# Altium PCB bh_ai8&di8_alph_back.PcbDoc
Units mil, origin at the board's own origin, x right, y up, seen from the top; angles counter-clockwise.
Board outline 2322.83 x 1535.43 mil, 2 copper layers (Top Layer, Bottom Layer); 75 components, 78 nets, 243 pads, 14 vias.
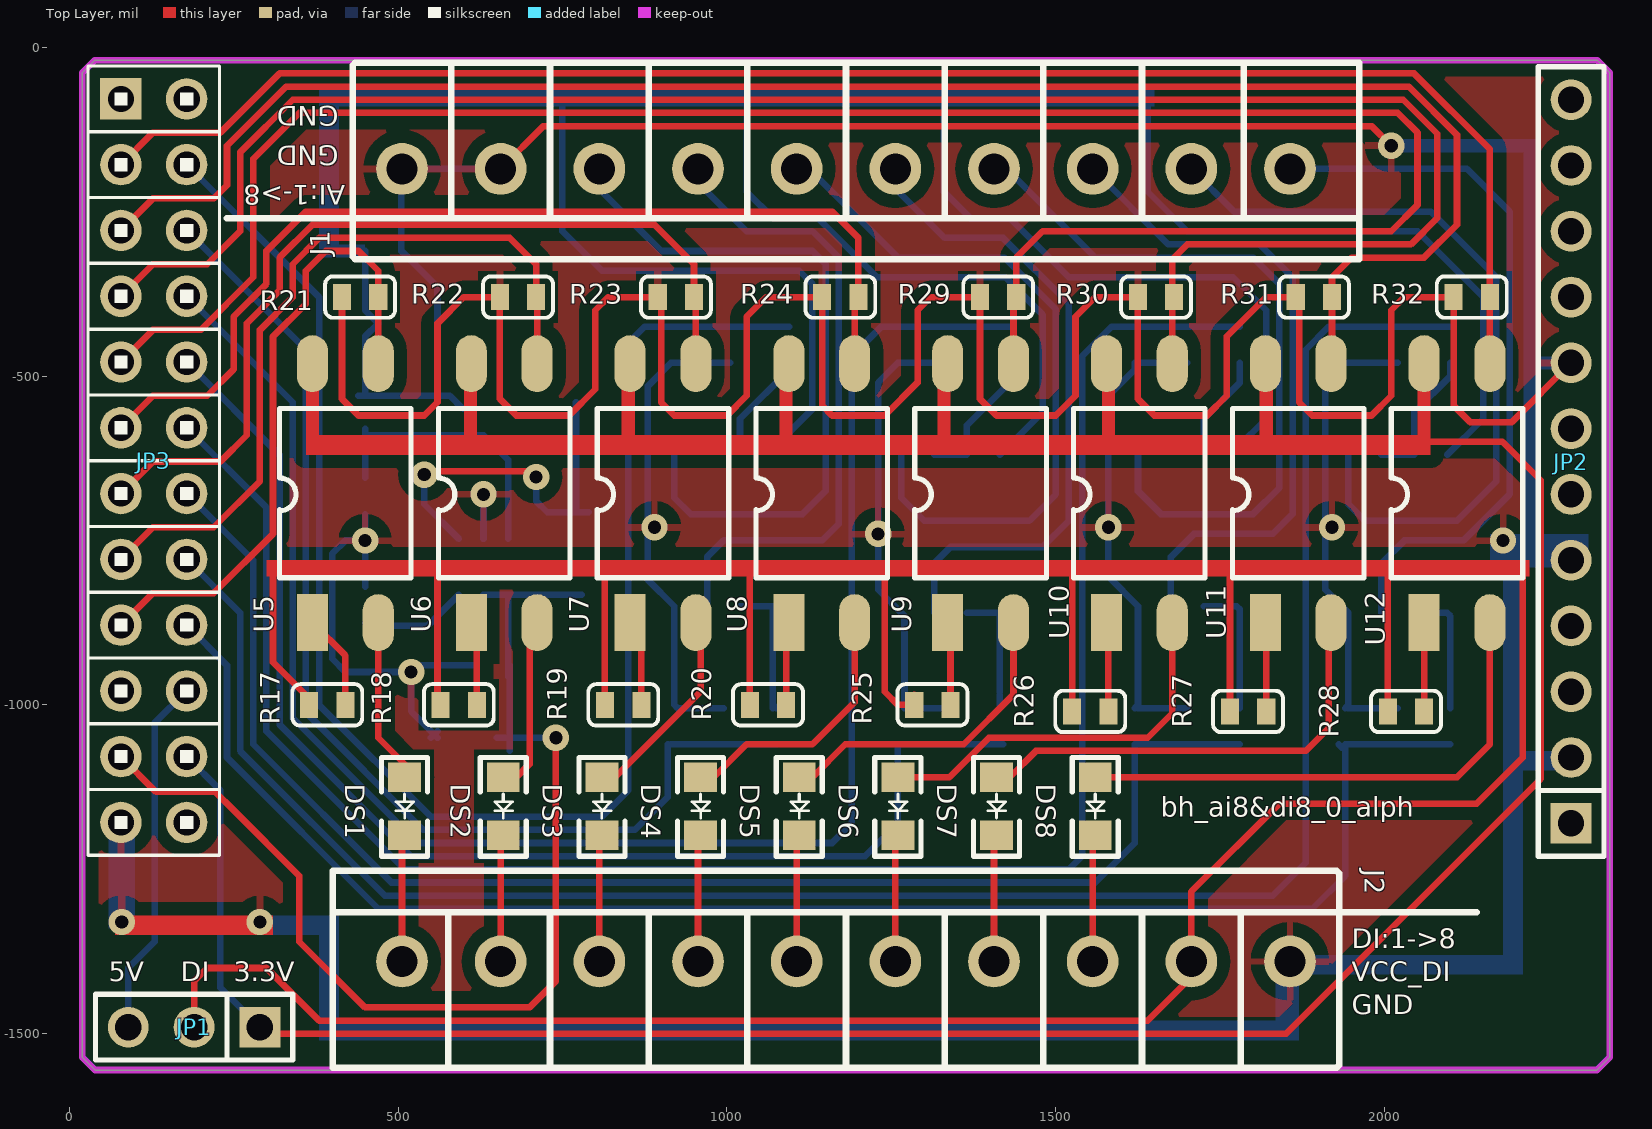
[diagram p0: Top Layer view]
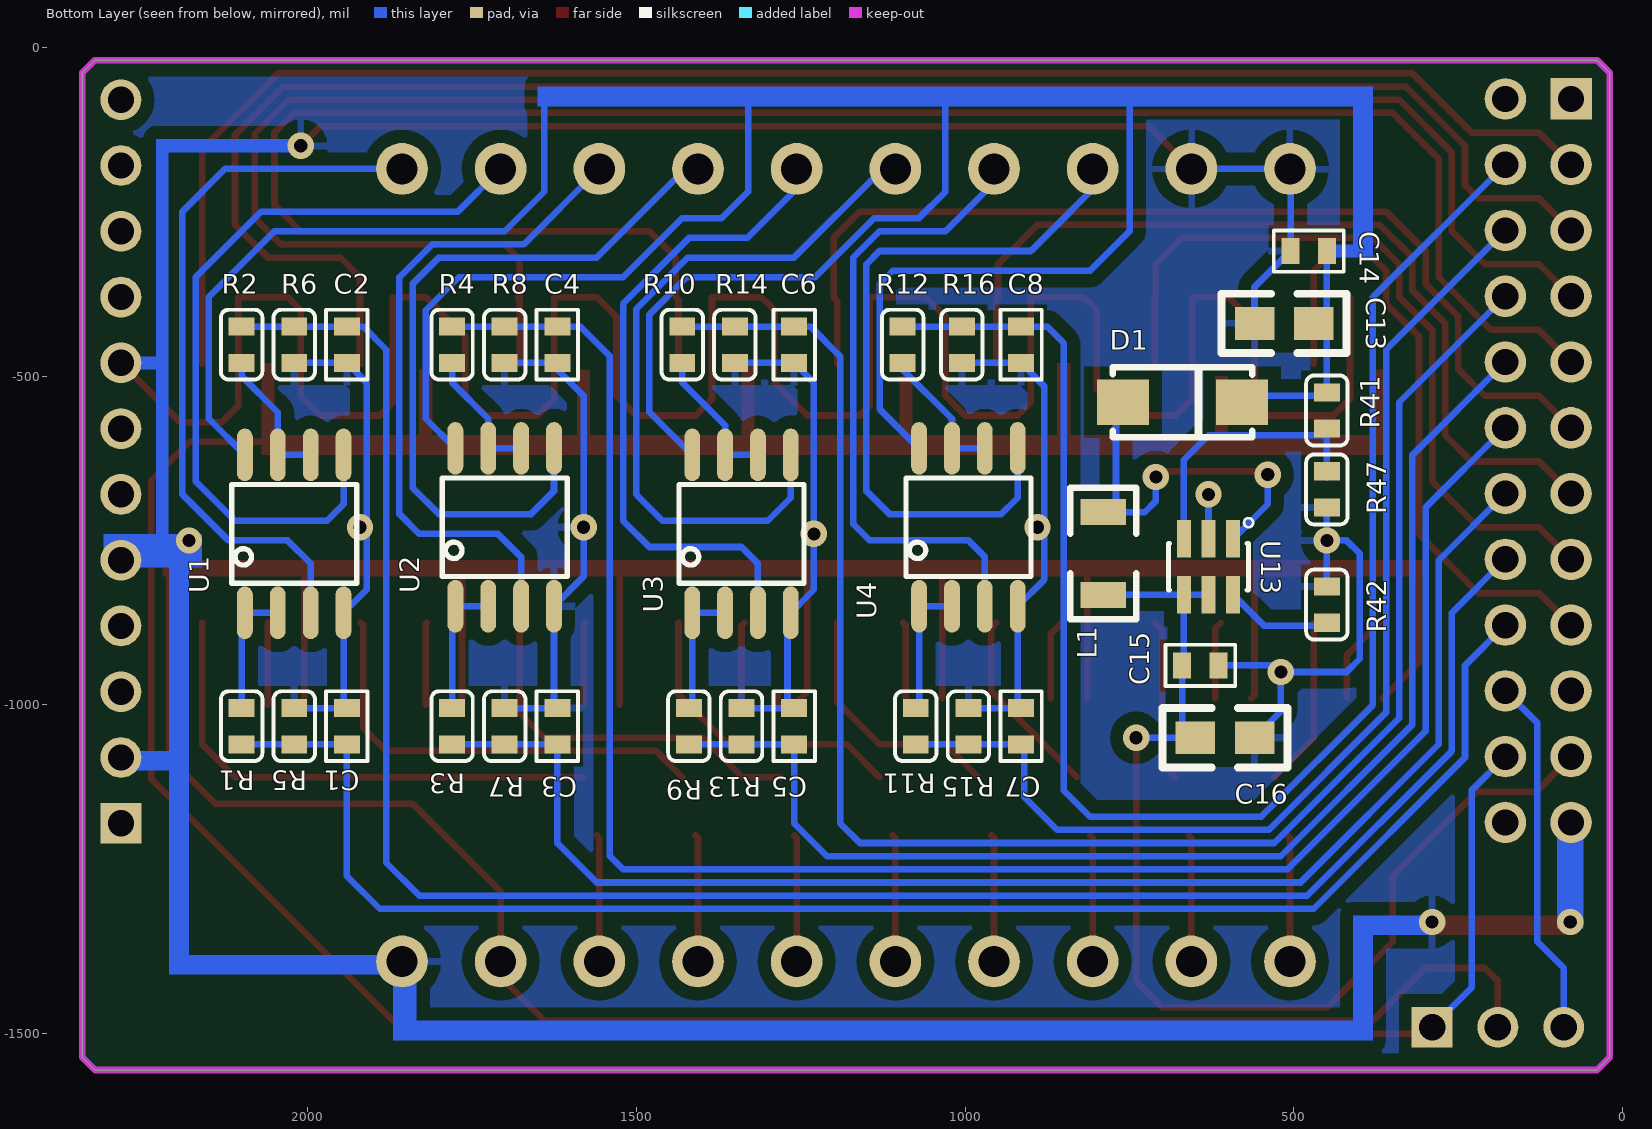
[diagram p1: Bottom Layer view, seen from below]

## Layer stack, top to bottom
Top Layer: signal copper 1.4
Dielectric: dielectric 12.6, FR-4, Dk 4.8
Bottom Layer: signal copper 1.4

## Board outline
19.68,-39.37 39.37,-19.68 2322.83,-19.68 2342.52,-39.37 2342.52,-1535.43 2322.83,-1555.12 39.37,-1555.12 19.68,-1535.43

## Design rules (kind name [scope] priority, off if disabled: settings)
Clearance Clearance_1 [(InPolygon)] p1: gap=20
Clearance [All] p2: gap=10
MinimumSolderMaskSliver [All] p1 off: minsoldermaskwidth=10
PolygonConnect [All] p1: connectstyle=Relief reliefconductorwidth=10 reliefentries=4 polygonreliefangle="90 Angle"
RoutingVias [All] p1: holewidth=20 width=40 viastyle="Through Hole" minholewidth=20 minwidth=40 maxholewidth=20 maxwidth=40
SilkToSilkClearance [All] p1: silktosilkclearance=5
SilkscreenOverComponentPads [All] p1 off: minsilkscreentomaskgap=5
SolderMaskExpansion [All] p1: expansion=4
Width Width_1 [(InNet('GND') OR InNet('VBUS') OR InNet('VCC_7.2V') OR InNet('VCC_BASE_5V') OR InNet('VCC_DI') OR InNet('VCC_SENSOR_3.3V') OR InNet('VCC_SENSOR_5V'))] p1: maxlimit=20 minlimit=10 preferedwidth=20 minimp=50.000000 maximp=50.000000 favimp=50.000000
Width [All] p2: maxlimit=10 minlimit=10 preferedwidth=10
25 further rules are at their usual default settings.

## Components (designator, comment, footprint, x,y, rotation, side; value= is the part's Value field where it differs from the comment)
C1 "CAP-SMD" C0603 1940,-1060 r90 bottom
C2 "CAP-SMD" C0603 1940,-424.88 r270 bottom
C3 "CAP-SMD" C0603 1620,-1060 r90 bottom
C4 "CAP-SMD" C0603 1620,-424.88 r270 bottom
C5 "CAP-SMD" C0603 1260,-1060 r90 bottom
C6 "CAP-SMD" C0603 1260,-424.88 r270 bottom
C7 "CAP-SMD" C0603 915,-1060 r90 bottom
C8 "CAP-SMD" C0603 915,-424.88 r270 bottom
C13 "22uF/16V" C0805 470,-420 r0 bottom
C14 "0.1uF" C0603 450,-310 r0 bottom
C15 "0.1uF" C0603 670,-940 r180 bottom
C16 "10uF/6.3V" C0805 650,-1050 r180 bottom
D1 "SM340A" DO-214 760,-540 r180 bottom
DS1 "LED" D0805 510,-1110 r270 top
DS2 "LED" D0805 660,-1110 r270 top
DS3 "LED" D0805 810,-1110 r270 top
DS4 "LED" D0805 960,-1110 r270 top
DS5 "LED" D0805 1110,-1110 r270 top
DS6 "LED" D0805 1260,-1110 r270 top
DS7 "LED" D0805 1410,-1110 r270 top
DS8 "LED" D0805 1560,-1110 r270 top
J1 "SIP1X10" CON10*0.381 1181.1,-185 r90 top
J2 "SIP1X10" CON10*0.381 1181.1,-1390 r270 top
JP1 "JUMPER3" SIP1X3X2.54 290,-1490 r180 top
JP2 "SPI/UART Connector" SIP1x12x2.54 2283.46,-1180 r90 top locked
JP3 "Sensor Connector" SIP2X12X2.54 78.74,-78.74 r270 top locked
L1 "INDUCTOR" R1206 790,-770 r90 bottom
R1 "10k 1%" R0603 2100,-1004.88 r270 bottom
R2 "10k 1%" R0603 2100,-424.88 r270 bottom
R3 "10k 1%" R0603 1780,-1004.88 r270 bottom
R4 "10k 1%" R0603 1780,-424.88 r270 bottom
R5 "10k 1%" R0603 2020,-1060 r90 bottom
R6 "10k 1%" R0603 2020,-424.88 r270 bottom
R7 "10k 1%" R0603 1700,-1060 r90 bottom
R8 "10k 1%" R0603 1700,-424.88 r270 bottom
R9 "10k 1%" R0603 1420,-1004.88 r270 bottom
R10 "10k 1%" R0603 1430,-424.88 r270 bottom
R11 "10k 1%" R0603 1075,-1004.88 r270 bottom
R12 "10k 1%" R0603 1095,-424.88 r270 bottom
R13 "10k 1%" R0603 1340,-1060 r90 bottom
R14 "10k 1%" R0603 1350,-424.88 r270 bottom
R15 "10k 1%" R0603 995,-1060 r90 bottom
R16 "10k 1%" R0603 1005,-424.88 r270 bottom
R17 "2k" R0603 420,-1000 r180 top
R18 "2k" R0603 620,-1000 r180 top
R19 "2k" R0603 870,-1000 r180 top
R20 "2k" R0603 1090,-1000 r180 top
R21 "2k" R0603 470,-380 r180 top
R22 "2k" R0603 710,-380 r180 top
R23 "2k" R0603 950,-380 r180 top
R24 "2k" R0603 1200,-380 r180 top
R25 "2k" R0603 1340,-1000 r180 top
R26 "2k" R0603 1580,-1010 r180 top
R27 "2k" R0603 1820,-1010 r180 top
R28 "2k" R0603 2060,-1010 r180 top
R29 "2k" R0603 1440,-380 r180 top
R30 "2k" R0603 1680,-380 r180 top
R31 "2k" R0603 1920,-380 r180 top
R32 "2k" R0603 2160,-380 r180 top
R41 "110k 1%" R0603 450,-580 r90 bottom
R42 "18k" R0603 450,-820 r270 bottom
R47 "10k 1%" R0603 450,-700 r90 bottom
U1 "LM358N" SO8NB 2020,-740 r180 bottom
U2 "LM358N" SO8NB 1700,-730 r180 bottom
U3 "LM358N" SO8NB 1340,-740 r180 bottom
U4 "LM358N" SO8NB 995,-730 r180 bottom
U5 "PC817" SOP_4 370,-870 r0 top
U6 "PC817" SOP_4 611.43,-870 r0 top
U7 "PC817" SOP_4 852.86,-870 r0 top
U8 "PC817" SOP_4 1094.29,-870 r0 top
U9 "PC817" SOP_4 1335.71,-870 r0 top
U10 "PC817" SOP_4 1577.14,-870 r0 top
U11 "PC817" SOP_4 1818.57,-870 r0 top
U12 "PC817" SOP_4 2060,-870 r0 top
U13 "FP6291" SOT23-6 630,-790 r180 bottom

## Footprints (in the part's own frame and the unit in brackets; to place one, negate y for a bottom-side part, rotate by r counter-clockwise, add the part's x,y. Pads: shape width x height; smd on the part's side, far side on the other; paste and mask are expansions set on the pad)
C0603 [mm]
  rect 0.7x1 smd: 1(0,0) 2(1.4,0)
  silkscreen extent -0.65,-0.8 2.05,0.8, body extent -0.09,-0.38 1.51,0.42, height 0.3
C0805 [mil]
  rect 60x50 smd: 1(0,0) 2(90,0)
  silkscreen extent -50,-45 140,45, body extent 6,-25 84,25, height 31
CON10*0.381 [mm]
  round 2 hole 1.2: 1(0,-17.145) 2(0,-13.335) 3(0,-9.525) 4(0,-5.715) 5(0,-1.905) 6(0,1.905) 7(0,5.715) 8(0,9.525) 9(0,13.335) 10(0,17.145)
  silkscreen extent -3.5,-19.81 4.1,19.05
D0805 [mil]
  rect 45x50 smd: A(0,0) K(88,0)
  silkscreen extent -30,-35 120,35, body extent 7,-20 88,16, height 33
DO-214 [mm]
  rect 2x1.75 smd: 1(0,0) 2(4.6,0)
  silkscreen extent -0.4,-1.35 5,1.35, body extent -0.2,-1.34 4.91,1.33, height 2.12
R0603 [mm]
  rect 0.7x1 smd: 1(0,0) 2(1.4,0)
  silkscreen extent -0.65,-0.8 2.05,0.8, body extent -0.1,-0.4 1.5,0.4, height 0.3
R1206 [mm] "Chip Resistor, 2-Leads, Body 3.2x1.6mm, IPC Medium Density"
  rect 1x1.75 smd: 1(-1.6,0) 2(1.6,0)
  silkscreen extent -2.54,-1.27 2.54,1.27, body extent -1.65,-0.8 1.65,0.8, height 0.6
SIP1X3X2.54 [mil]
  rect 62x62 hole 40: 1(0,0)
  round 62 hole 40: 2(100,0) 3(200,0)
  silkscreen extent -50,-50 250,50, body extent -49,-53 253,47, height 340
SIP1x12x2.54 [mil]
  rect 62x62 hole 40: 1(0,0)
  round 62 hole 40: 2(100,0) 3(200,0) 4(300,0) 5(400,0) 6(500,0) 7(600,0) 8(700,0) 9(800,0) 10(900,0) 11(1000,0) 12(1100,0)
  silkscreen extent -50,-50 1150,50
SIP2X12X2.54 [mil]
  rect 63x63 hole 40: 1(0,0)
  round 63 hole 40: 2(0,100) 3(100,0) 4(100,100) 5(200,0) 6(200,100) 7(300,0) 8(300,100) 9(400,0) 10(400,100) 11(500,0) 12(500,100) 13(600,0) 14(600,100) 15(700,0) 16(700,100) 17(800,0) 18(800,100) 19(900,0) 20(900,100) 21(1000,0) 22(1000,100) 23(1100,0) 24(1100,100)
  silkscreen extent -50,-50 1150,150, body extent -51,-52 1148,150, height 340
SO8NB [mil]
  oval 24x80 smd: 1(-75,-120) 2(-25,-120) 3(25,-120) 4(75,-120) 5(75,120) 6(25,120) 7(-25,120) 8(-75,120)
  silkscreen extent -95,-75 95,75, body extent -97,-118 96,118, height 61
SOP_4 [mm] "SOP_4"
  rect 1.2x2.2 smd: 1(0,-0.127)
  oval 1.2x2.2 smd: 2(2.54,-0.127) 3(2.54,9.873) 4(0,9.873)
  silkscreen extent -1.27,1.61 3.81,8.14
SOT23-6 [mm] "SOT-23/SC-74A; 5 Leads; Body 3.1 x 3 mm, inc. leads (LxW max)"
  rect 0.55x1.45 smd: 1(0.95,1.075) 2(0,1.075) 3(-0.95,1.075) 4(-0.95,-1.075) 5(0,-1.075) 6(0.95,-1.075)
  silkscreen extent -1.55,-0.9 1.72,1.88, body extent -1.4,-1.19 1.4,1.23, height 1.08

## Part data
C1 C2 C3 C4 C5 C6 C7 C8: "SMD-CAP"
C13 C14 C15 C16: library part CAP-SMD, "SMD-CAP"
D1: library part "DIODE SCHOTTKY", "Schottky Diode"
J1 J2: "Connector"
JP1: "Jumper"
JP2: library part SIP1X12, "12 Pin Header"
JP3: library part SIP2X12
L1: "Inductor"
R1 R2 R3 R4 R5 R6 R7 R8 R9 R10 R11 R12 R13 R14 R15 R16 R17 R18 R19 R20 R21 R22 R23 R24 R25 R26 R27 R28 R29 R30 R31 R32 R41 R42 R47: library part RES, "Resistor"
U5 U6 U7 U8 U9 U10 U11 U12: library part P521*1

## Via types
v1: diameter 40, hole 20, Top Layer to Bottom Layer, 14 vias

## Nets (pads, with @x,y where several pads share a name; then routed paths per layer and width w, separated by ;. In a path a pad name is that pad's centre, name@x,y a point inside that pad or via, vN(x,y) a via of type N, cw(c..) or ccw(c..) an arc to the next point about the centre after c; other vN are vias at no path point)
AD0: C1.1 JP3.18 R1.2 R5.1 | length 2409.7
  Bottom Layer w10: JP3.18 240,-940 240,-1080 470,-1310 1890,-1310 1940,-1260 C1.1 R1.2 ; C1.1@1930,-1060 C1.1@1935,-1065
AD1: C2.1 JP3.16 R2.1 R6.1 | length 3071.3
  Bottom Layer w10: JP3.16 260,-860 260,-1070 480,-1290 1830,-1290 1880,-1240 1880,-460 1915.12,-424.88 C2.1 R6.1 R2.1
AD2: C3.1 JP3.14 R3.2 R7.1 | length 2185
  Bottom Layer w10: JP3.14 280,-780 280,-1060 490,-1270 1560,-1270 1620,-1210 C3.1 R3.2
AD3: C4.1 JP3.12 R4.1 R8.1 | length 2865.4
  Bottom Layer w10: JP3.12 300,-700 300,-1040 510,-1250 1520,-1250 1540,-1230 1540,-470 1585.12,-424.88 C4.1 R8.1 R4.1
AD4: C5.1 JP3.10 R9.2 R13.1 | length 1933.3
  Bottom Layer w10: JP3.10 320,-620 320,-1030 520,-1230 1210,-1230 1260,-1180 C5.1 R9.2
AD5: C6.1 JP3.8 R10.1 R14.1 | length 2617.9
  Bottom Layer w10: JP3.8 340,-540 340,-1020 530,-1210 1160,-1210 1190,-1180 1190,-470 1235.12,-424.88 C6.1 R14.1 R10.1
AD6: C7.1 JP3.6 R11.2 R15.1 | length 1692.6
  Bottom Layer w10: JP3.6 360,-460 360,-1011.72 538.28,-1190 860,-1190 910,-1140 C7.1@910,-1060 ; C7.1 R15.1 R11.2
AD7: C8.1 JP3.4 R12.1 R16.1 | length 2397
  Bottom Layer w10: JP3.4 380,-380 380,-1000 550,-1170 810,-1170 850,-1130 850,-450 875.12,-424.88 C8.1 R16.1 R12.1
AI0: J1.1 U1.3 | length 1104.3
  Bottom Layer w10: J1.1 2125,-185 2190,-250 2190,-680 2120,-750 2030,-750 1995,-785 U1.3
AI1: J1.2 U1.5 | length 1177.5
  Bottom Layer w10: J1.2 1771.1,-250 2070,-250 2170,-350 2170,-660 2110,-720 1970,-720 1945,-695 U1.5
AI2: J1.3 U2.3 | length 1019.2
  Bottom Layer w10: J1.3 1671.1,-300 1810,-300 1860,-350 1860,-710 1830,-740 1710,-740 1675,-775 U2.3
AI3: J1.4 U2.5 | length 1127.5
  Bottom Layer w10: J1.4 1425,-185 1560,-320 1800,-320 1840,-360 1840,-670 1800,-710 1660,-710 1625,-675 U2.5
AI4: J1.5 U3.3 | length 1015.7
  Bottom Layer w10: J1.5@1226.1,-185 1331.1,-290 1420,-290 1520,-390 1520,-720 1480,-760 1340,-760 1315,-785 U3.3
AI5: J1.6 U3.5 | length 1095
  Bottom Layer w10: J1.6 1125,-185 1260,-320 1421.72,-320 1500,-398.28 1500,-680 1460,-720 1300,-720 1265,-685 U3.5
AI6: J1.7 U4.3 | length 991.6
  Bottom Layer w10: J1.7@935,-185 1030,-280 1130,-280 1170,-320 1170,-725 1145,-750 995,-750 970,-775 U4.3
AI7: J1.8 U4.5 | length 1109.9
  Bottom Layer w10: J1.8@775,-185 900,-310 1130,-310 1150,-330 1150,-675 1115,-710 945,-710 920,-685 U4.5
DI0: DS1.K J2.1 | length 193.6
  Top Layer w10: J2.1 506.1,-1201.9 DS1.K
DI1: DS2.K J2.2 | length 193.6
  Top Layer w10: J2.2 656.1,-1201.9 DS2.K
DI2: DS3.K J2.3 | length 193.6
  Top Layer w10: J2.3 806.1,-1201.9 DS3.K
DI3: DS4.K J2.4 | length 193.6
  Top Layer w10: J2.4 956.1,-1201.9 DS4.K
DI4: DS5.K J2.5 | length 193.6
  Top Layer w10: J2.5 1106.1,-1201.9 DS5.K
DI5: DS6.K J2.6 | length 193.6
  Top Layer w10: J2.6 1256.1,-1201.9 DS6.K
DI6: DS7.K J2.7 | length 193.6
  Top Layer w10: J2.7 1406.1,-1201.9 DS7.K
DI7: DS8.K J2.8 | length 193.6
  Top Layer w10: J2.8 1556.1,-1201.9 DS8.K
EX_RXD2: JP2.4
EX_RXD5: JP2.7
EX_SPI_CS: JP2.9
EX_TXD2: JP2.3
EX_TXD5: JP2.6
GND: C1.2 C2.2 C3.2 C4.2 C5.2 C6.2 C7.2 C8.2 C13.2 C14.2 C15.2 C16.2 J1.9 J1.10 J2.10 JP2.2 JP2.5 JP2.8 JP3.23 R5.2 R6.2 R7.2 R8.2 R13.2 R14.2 R15.2 R16.2 R21.2 R22.2 R23.2 R24.2 R29.2 R30.2 R31.2 R32.2 R42.1 R47.1 U1.4 U2.4 U3.4 U4.4 U13.2 | length 9778.9
  Top Layer w10: R21.2 414.88,-534.88 440,-560 540,-560 560,-540 560,-420 600,-380 R22.2 654.88,-534.88 680,-560 760,-560 800,-520 800,-400 820,-380 R23.2 900,-380 900,-540 920,-560 1000,-560 1030,-530 1030,-410 1060,-380 R24.2 1144.88,-544.88 1160,-560 1240,-560 1290,-510 1290,-400 1310,-380 R29.2 1384.88,-534.88 1410,-560 1500,-560 1530,-530 1530,-410 1560,-380 R30.2 1624.88,-534.88 1650,-560 1730,-560 1760,-530 1760,-440 1820,-380 1870,-380 1870,-540 1890,-560 1980,-560 2010,-530 2010,-400 2030,-380 R32.2 2104.88,-544.88 2130,-570 2193.46,-570 JP2.8 ; J1.9@665,-185 J1.9 721.1,-120 1980,-120 v1(2010,-150)
  Bottom Layer w10: v1@78.74,-1328.74 v1(80,-1330) ; R42.1 v1@450,-760 ; R47.1@450,-710 v1(450,-750) ; C16.2@550,-1050 C16.2@555,-1045 ; C16.2 C16.2@555,-1045 ; C16.2@560,-1040 C16.2@555,-1045 ; C13.2 560,-364.88 C14.2 505.12,-185.98 J1.10 J1.9 ; C15.2 530,-940 v1(520,-950) ; U13.2 v1(630,-680) ; R15.2 925,-1004.88 920,-999.88 U4.4 880,-810 880,-515 C8.2 R16.2 ; R13.2 1270,-1004.88 1270,-865 1230,-825 1230,-510 C6.2 R14.2 ; C3.2 1625,-999.88 1625,-940 ; C3.2@1625,-1004.88 R7.2 ; 1625,-945 1625,-940 ; R8.2 C4.2 1620,-490 1580,-530 1580,-805 U2.4 1625,-940 ; C1.2 1945,-999.88 U1.4 1910,-825 1910,-510 C2.2 R6.2 ; C1.2@1945,-1004.88 R5.2 ; 2230,-750 2260,-780 JP2.5 ; JP2.2@2270,-1080 JP2.2 ; v1@450,-760 440,-760 v1(450,-750) ; v1@450,-760 v1(450,-750) ; v1(450,-750) 420,-750 400,-770 400,-930 420,-950 v1(520,-950) ; v1(520,-950) 520,-1010 C16.2@555,-1045
  other v1: 290,-1330 2180,-750 1230,-740 890,-730 1580,-730 1920,-730
IO0: 
IO1: JP3.17 R21.1 U5.3 | length 985.6
  Top Layer w10: JP3.17 127.48,-830 220,-830 310,-740 310,-440 360,-390 360,-340 390,-310 440,-310 470,-340 R21.1 U5.3
IO2: JP3.15 R22.1 U6.3 | length 1166.2
  Top Layer w10: JP3.15 127.48,-730 220,-730 290,-660 290,-430 340,-380 340,-330 380,-290 670,-290 710,-330 R22.1 711.43,-381.43 U6.3
IO3: JP3.13 R23.1 U7.3 | length 1346.8
  Top Layer w10: JP3.13 127.48,-630 230,-630 270,-590 270,-420 320,-370 320,-320 370,-270 890,-270 950,-330 R23.1 952.86,-382.86 U7.3
IO4: JP3.11 R24.1 U8.3 | length 1543.8
  Top Layer w10: JP3.11 127.48,-530 210,-530 250,-490 250,-410 300,-360 300,-310 360,-250 1160,-250 1200,-290 R24.1 1194.29,-385.71 U8.3
IO5: JP3.9 R29.1 U9.3 | length 3162.2
  Top Layer w10: JP3.9 127.48,-430 200,-430 280,-350 280,-170 350,-100 2020,-100 2050,-130 2050,-240 2010,-280 1480,-280 1440,-320 R29.1 1435.71,-384.29 U9.3
IO6: JP3.7 R30.1 U10.3 | length 2936.4
  Top Layer w10: JP3.7 127.48,-330 210,-330 260,-280 260,-160 340,-80 2028.28,-80 2080,-131.72 2080,-260 2040,-300 1700,-300 1677.14,-322.86 R30.1@1677.14,-382.86 ; U10.3 R30.1@1677.14,-382.86 ; R30.1 R30.1@1677.14,-382.86
IO7: JP3.5 R31.1 U11.3 | length 2679
  Top Layer w10: JP3.5 127.48,-230 220,-230 240,-210 240,-150 330,-60 2036.57,-60 2110,-133.43 2110,-270 2060,-320 1950,-320 1920,-350 R31.1 1920,-479.87 U11.3
IO8: JP3.3 R32.1 U12.3 | length 2512.6
  Top Layer w10: JP3.3 127.48,-130 230,-130 320,-40 2044.85,-40 2160,-155.15 R32.1 U12.3
NetD1_1: D1.1 L1.2 U13.1 | length 585.5
  Top Layer w10: v1(540,-650) 545,-645 701.34,-645 v1(710,-653.66)
  Bottom Layer w10: v1(540,-650) 540,-695.08 U13.1 ; v1(710,-653.66) 710,-690 727.01,-707.01 L1.2 ; L1.2@770.67,-707.01 D1.1@770.67,-540
NetDS1_A: DS1.A U5.2 | length 259.9
  Top Layer w10: U5.2 470,-1050 DS1.A@530,-1110
NetDS2_A: DS2.A U6.2 | length 248
  Top Layer w10: DS2.A@680,-1110 700,-1090 700,-886.43 U6.2
NetDS3_A: DS3.A U7.2 | length 291.8
  Top Layer w10: DS3.A@830,-1110 960,-980 960,-882.14 U7.2
NetDS4_A: DS4.A U8.2 | length 382.3
  Top Layer w10: DS4.A@980,-1110 1030,-1060 1130,-1060 1194.29,-995.71 U8.2
NetDS5_A: DS5.A U9.2 | length 467.1
  Top Layer w10: DS5.A@1130,-1110 1180,-1060 1360,-1060 1435.71,-984.29 U9.2
NetDS6_A: DS6.A U10.2 | length 575.2
  Top Layer w10: DS6.A@1280,-1110 1338.28,-1110 1398.28,-1050 1640,-1050 1677.14,-1012.86 U10.2
NetDS7_A: DS7.A U11.2 | length 677.5
  Top Layer w10: DS7.A@1430,-1110 1470,-1070 1880,-1070 1915,-1035 1915,-878.57 U11.2
NetDS8_A: DS8.A U12.2 | length 785.7
  Top Layer w10: DS8.A@1580,-1110 2110,-1110 2160,-1060 U12.2
NetR1_1: R1.1 U1.1 U1.2 | length 197
  Bottom Layer w10: U1.2 U1.1 2100,-865 R1.1
NetR2_2: R2.2 U1.6 U1.7 | length 212.8
  Bottom Layer w10: U1.6 U1.7 2045,-555 2100,-500 R2.2
NetR3_1: R3.1 U2.1 U2.2 | length 207
  Bottom Layer w10: U2.2 U2.1 1780,-855 R3.1
NetR4_2: R4.2 U2.6 U2.7 | length 202.8
  Bottom Layer w10: U2.6 U2.7 1725,-565 1780,-510 R4.2
NetR9_1: R9.1 U3.1 U3.2 | length 184.9
  Bottom Layer w10: U3.2 U3.1 1415,-979.88 ; R9.1@1415,-999.88 1415,-984.88
NetR10_2: R10.2 U3.6 U3.7 | length 216.9
  Bottom Layer w10: U3.6 U3.7 1365,-575 1430,-510 R10.2
NetR11_1: R11.1 U4.1 U4.2 | length 212
  Bottom Layer w10: U4.2 U4.1 R11.1@1070,-1004.88 ; R11.1@1070,-999.88 R11.1
NetR12_2: R12.2 U4.6 U4.7 | length 211.1
  Bottom Layer w10: U4.6 U4.7 1020,-565 1095,-490 R12.2
NetR17_1: R17.1 U5.1 | length 135.7
  Top Layer w10: U5.1 420,-925 R17.1@420,-990
NetR18_1: R18.1 U6.1 | length 118.6
  Top Layer w10: U6.1 620,-883.57 R18.1@620,-990
NetR19_1: R19.1 U7.1 | length 122.1
  Top Layer w10: U7.1 870,-892.14 R19.1@870,-990
NetR20_1: R20.1 U8.1 | length 116.8
  Top Layer w10: R20.1@1090,-990 1090,-879.29 U8.1
NetR25_1: R25.1 U9.1 | length 116.8
  Top Layer w10: U9.1 1340,-879.29 R25.1@1340,-990
NetR26_1: R26.1 U10.1 | length 126.2
  Top Layer w10: U10.1 1580,-877.86 R26.1@1580,-1000
NetR27_1: R27.1 U11.1 | length 125.6
  Top Layer w10: U11.1 1820,-876.43 R27.1@1820,-1000
NetR28_1: R28.1 U12.1 | length 125
  Top Layer w10: R28.1@2060,-1000 U12.1
NetR41_1: R41.1 R47.2 U13.3 | length 438.1
  Bottom Layer w10: R47.2@450,-654.88 R41.1 450,-590 630,-590 667.4,-627.4 U13.3
NetR42_2: R42.2 U13.6 | length 164.4
  Bottom Layer w10: R42.2 454.88,-880 544.92,-880 U13.6
ONE_WIRE: JP3.19
SCL: JP3.2
SCLK: JP2.11
SDA: JP3.1
SIMO: JP2.10
SOMI: JP2.12
VBUS: C15.1 C16.1 JP3.21 L1.1 U13.4 U13.5 | length 1797.5
  Top Layer w10: JP3.21 132.24,-1132.24 222.24,-1132.24 250,-1160 350,-1260 350,-1360 450,-1460 700,-1460 740,-1420 740,-1060 750,-1050 v1(740,-1050)
  Bottom Layer w10: JP3.21@78.74,-1098.74 JP3.21 ; U13.5 U13.4 ; C16.1 v1(740,-1050) ; C15.1@667.4,-957.4 U13.4 ; C15.1@667.4,-937.4 C15.1 C16.1@670,-1070 ; L1.1@770,-832.32 L1.1@770.67,-832.99 ; L1.1@779.33,-832.32 U13.4
VCC_7.2V: C13.1 C14.1 D1.2 R41.2 U1.8 U2.8 U3.8 U4.8 | length 4126.5
  Bottom Layer w10: R41.2@440,-530 578.9,-530 D1.2@598.9,-550 ; R41.2 450,-440 C13.1 450,-400 C14.1 ; 750,-70 750,-280 810,-340 1110,-340 1130,-360 1130,-550 U4.8 ; 1030,-70 1030,-220 1070,-260 1138.28,-260 1228.28,-350 1423.43,-350 1480,-406.57 1480,-555 U3.8 ; 1330,-80 1330,-220 1370,-260 1430,-260 1520,-350 1770,-350 1820,-400 1820,-565 U2.8 ; 1640,-80 1640,-220 1700,-280 2050,-280 2150,-380 2150,-565 U1.8
VCC_BASE_5V: JP3.24
VCC_DI: J2.9 JP1.2 R17.2 R18.2 R19.2 R20.2 R25.2 R26.2 R27.2 R28.2 | length 4338
  Top Layer w10: JP1.2 190,-1420 210,-1400 300,-1400 380,-1480 1640,-1480 1706.1,-1413.9 J2.9 1706.1,-1283.9 1840,-1150 2140,-1150 2210,-1080 2210,-790 ; 310,-790 310,-935.12 R17.2@364.88,-990 ; 560,-790 560,-985.12 R18.2@564.88,-990 ; 814.23,-804.23 814.23,-989.35 R19.2@814.88,-990 ; R20.2@1034.88,-990 1034.88,-804.88 ; 1240,-790 1240,-980 1260,-1000 R25.2 ; R25.2@1284.88,-990 R25.2@1284.88,-984.62 ; R26.2@1524.88,-1000 1524.88,-794.88 ; R27.2@1764.88,-1000 1764.88,-784.88 ; R28.2@2004.88,-1000 2004.88,-790
VCC_SENSOR_3.3V: JP1.1 JP3.22 U5.4 U6.4 U7.4 U8.4 U9.4 U10.4 U11.4 U12.4 | length 3241.1
  Top Layer w10: JP1.1@280,-1500 1850,-1500 2237.46,-1112.54 2237.46,-658.41 2179.05,-600 2050,-600
  Bottom Layer w10: JP3.22 230,-1130 230,-1430 JP1.1
VCC_SENSOR_5V: JP1.3 JP3.20 | length 548
  Bottom Layer w10: JP1.3 90,-1400 130,-1360 130,-1027.48 JP3.20
pads on no net: JP2.1

## Polygon pours and split planes (outlines as drawn)
GND on Bottom Layer "Top Layer-No Net" (solid, remove dead copper, pour order 1000): 19.68,-39.37 39.37,-19.68 2322.83,-19.68 2342.52,-39.37 2342.52,-1535.43 2322.83,-1555.12 39.37,-1555.12 19.69,-1535.43 19.68,-1535.43
GND on Top Layer "Top Layer-No Net" (solid, remove dead copper, pour order 1001): 19.68,-39.37 39.37,-19.68 2322.83,-19.68 2342.52,-39.37 2342.52,-1535.43 2322.83,-1555.12 39.37,-1555.12 19.68,-1535.43

## Keep-outs
Keep-Out Layer:
  lines w10: 39.37,-1555.12 19.68,-1535.43 19.68,-39.37 39.37,-19.68 2322.83,-19.68 2342.52,-39.37 2342.52,-1535.43 ; 39.37,-1555.12 39.37,-1555.12 ; 39.37,-1555.12 2322.83,-1555.12 2342.52,-1535.43 ; 2342.52,-1535.43 2342.52,-1535.43

## Other copper
Top Layer:
  rectangle net VCC_SENSOR_3.3V: 360,-620 2070,-590
  rectangle net VCC_SENSOR_3.3V: 2050,-600 2070,-480
  rectangle net VCC_SENSOR_3.3V: 1810,-610 1830,-490
  rectangle net VCC_SENSOR_3.3V: 1570,-610 1590,-490
  rectangle net VCC_SENSOR_3.3V: 1320,-600 1340,-480
  rectangle net VCC_SENSOR_3.3V: 1080,-620 1100,-500
  rectangle net VCC_SENSOR_3.3V: 840,-600 860,-480
  rectangle net VCC_SENSOR_3.3V: 600,-620 620,-500
  rectangle net VCC_SENSOR_3.3V: 360,-610 380,-490
  rectangle net VCC_DI: 300,-804.88 2220,-780
  rectangle net GND: 70,-1350 310,-1320
Bottom Layer:
  rectangle net VCC_7.2V: 380,-320 410,-60
  rectangle net VCC_7.2V: 390,-320 450,-300
  rectangle net VCC_7.2V: 380,-90 1650,-60
  rectangle net GND: 2160,-791.28 2310,-740
  rectangle net GND: 2180,-1390 2210,-780
  rectangle net GND: 2200,-1100 2270,-1070
  rectangle net GND: 1850,-1410 2210,-1380
  rectangle net GND: 60,-1340 100,-1180
  rectangle net GND: 290,-1350 410,-1320
  rectangle net GND: 380,-1510 410,-1330
  rectangle net GND: 380,-1510 1870,-1480
  rectangle net GND: 1833.9,-1500 1870,-1390
  rectangle net GND: 2211.12,-750 2230,-150
  rectangle net GND: 2230,-490 2280,-470
  rectangle net GND: 2010,-160 2230,-140

## Silkscreen, mask and mechanical layers (free items; w line width, h text height)
Top Overlay:
  lines w10: 240,-260 431.1,-260 ; 1927.17,-1551.42 1930.75,-1547.83 ; 1931.1,-1315 2140,-1315
  text "GND" at 410,-90 h30 r180
  text "GND" at 410,-150 h30 r180
  text "AI:1->8" at 420,-210 h30 r180
  text "bh_ai8&di8_0_alph" at 1660,-1170 h30
  text "DI:1->8" at 1950,-1370 h30
  text "5V" at 60,-1420 h30
  text "DI" at 170,-1420 h30
  text "3.3V" at 250,-1420 h30
  text "VCC_DI" at 1950,-1420 h30
  text "GND" at 1950,-1470 h30